# Altium PCB PCB1.PcbDoc
Units mil, origin at the board's own origin, x right, y up, seen from the top; angles counter-clockwise.
Board outline 1968.5 x 590.55 mil, 2 copper layers (Top Layer, Bottom Layer); 17 components, 14 nets, 53 pads, 9 vias.
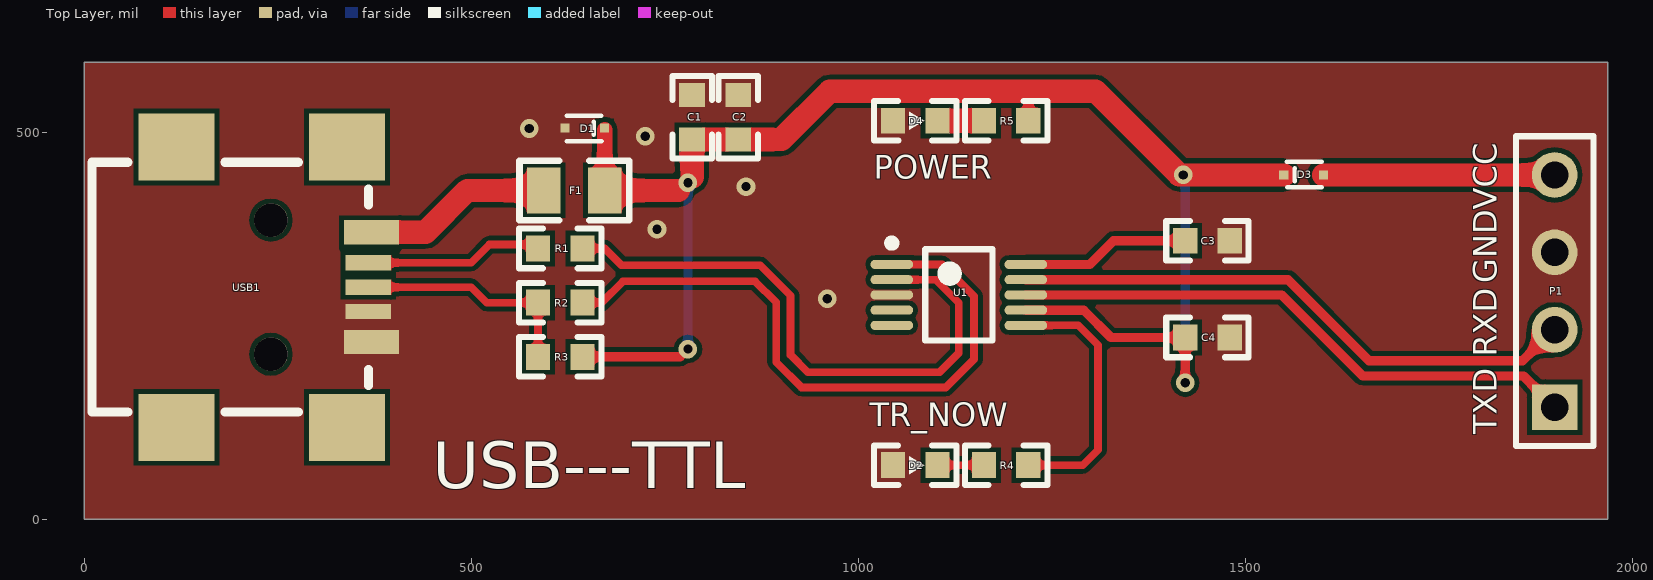
[diagram p0: Top Layer view]
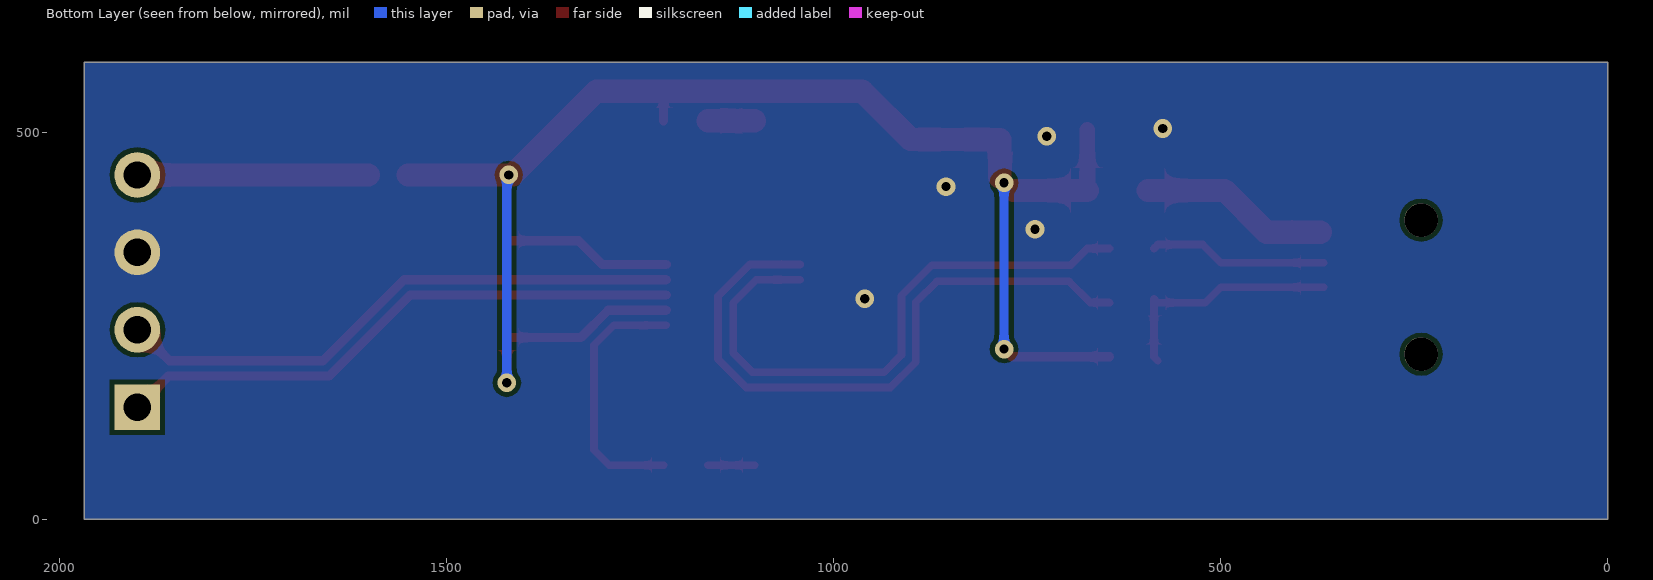
[diagram p1: Bottom Layer view, seen from below]
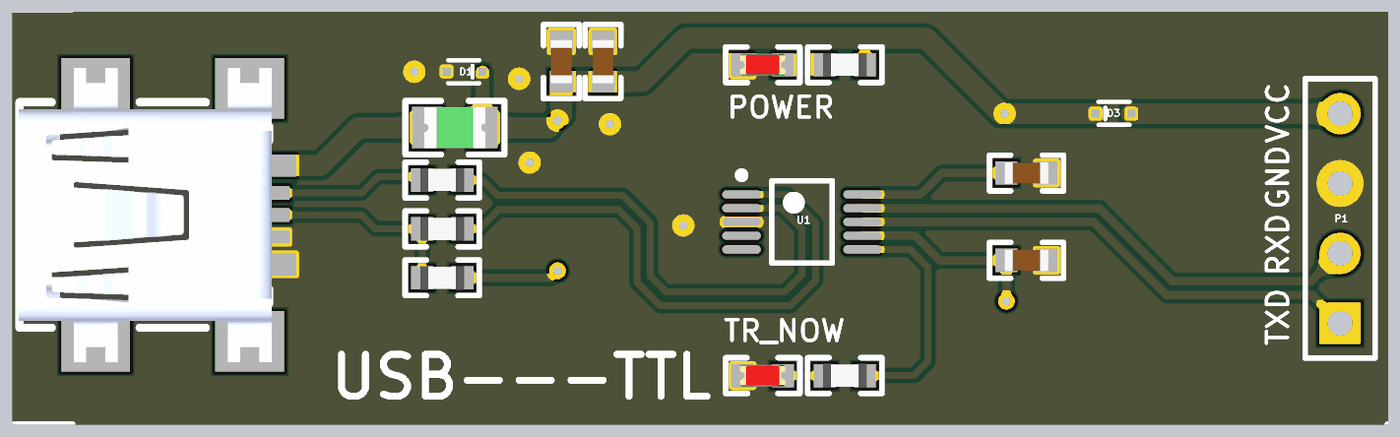
[diagram p2: 3D render of the assembled board from above, using the file's embedded part models]

## Layer stack, top to bottom
Top Solder: solder mask 0.4, Solder Resist, Dk 3.5
Top Layer: signal copper 1.4
Dielectric 1: dielectric 12.6, FR-4, Dk 4.8
Bottom Layer: signal copper 1.4
Bottom Solder: solder mask 0.4, Solder Resist, Dk 3.5

## Board outline
0,0 0,590.55 1968.5,590.55 1968.5,0

## Design rules (kind name [scope] priority, off if disabled: settings)
Clearance [All] p1: gap=6 ignorepadtopadclearanceinfootprint=TRUE
PlaneClearance [All] p1: clearance=8
PlaneConnect [All] p1: planeconnectstyle=Relief reliefexpansion=10 reliefentries=4 reliefconductorwidth=6 reliefairgap=8
PolygonConnect [All] p1: connectstyle=Direct reliefconductorwidth=10 reliefentries=4 polygonreliefangle="90 Angle" airgapwidth=10
RoutingVias [All] p1: holewidth=12 width=24 viastyle="Through Hole" minholewidth=12 minwidth=24 maxholewidth=12 maxwidth=24
SolderMaskExpansion [All] p1: expansion=4 istentingtop=FALSE
UnRoutedNet [All] p1: checkbadconnections=TRUE
Width [All] p1: maxlimit=30 minlimit=10 preferedwidth=10
27 further rules are at their usual default settings.

## Components (designator, comment, footprint, x,y, rotation, side; value= is the part's Value field where it differs from the comment)
C1 "106" C_SOP_0603 785.47,519.57 r270 top
C2 "104" C_SOP_0603 845,519.57 r270 top
C3 "104" C_SOP_0603 1451.26,360 r180 top
C4 "104" C_SOP_0603 1451.26,235 r0 top
D1 "DIODE" SOD-523 672.39,505.47 r180 top
D2 "LED" LED_0603_R 1073.74,70 r180 top
D3 "DIODE" SOD-523 1550,445 r0 top
D4 "LED" LED_0603_R 1073.74,515 r180 top
F1 "6V/0.5A" Fuse_0805 633.11,425 r0 top
P1 "Header 4" HDR1X4 1900,145 r90 top
R1 "33R" R_SMD_0603 615,350 r0 top
R2 "33R" R_SMD_0603 615,280 r0 top
R3 "NC" R_SMD_0603 615,210 r0 top
R4 "1K" R_SMD_0603 1191.26,70 r180 top
R5 "4.7K" R_SMD_0603 1191.26,515 r180 top
U1 "CH340E" MSOP_10 1130,290 r0 top
USB1 "USB_AB" USB_MINI_SMD 245,300 r180 top

## Footprints (in the part's own frame and the unit in brackets; to place one, negate y for a bottom-side part, rotate by r counter-clockwise, add the part's x,y. Pads: shape width x height; smd on the part's side, far side on the other; paste and mask are expansions set on the pad)
C_SOP_0603 [mm]
  rect 0.8x0.85 smd: 1(-0.73,0) 2(0.73,0)
  silkscreen extent -1.35,-0.65 1.35,0.65, body extent -0.8,-0.4 0.8,0.4, height 0.6
Fuse_0805 [mm]
  rect 1.1x1.5 smd: 1(-1,0) 2(1,0)
  silkscreen extent -1.8,-0.97 1.8,0.97, body extent -1.1,-0.75 1.1,0.75, height 1.24
HDR1X4 [mm] "Connector; Header; 4 Position"
  rect 1.5x1.5 hole 0.9: 1(0,0)
  round 1.5 hole 0.9: 2(2.54,0) 3(5.08,0) 4(7.62,0)
  silkscreen extent -1.27,-1.27 8.89,1.27
LED_0603_R [mm]
  rect 0.8x0.85 smd: 1(-0.73,0) 2(0.73,0)
  silkscreen extent -1.35,-0.65 1.35,0.65, body extent -0.81,-0.4 0.81,0.4, height 0.6
MSOP_10 [mm] "TSSOP, 10-Leads, Body 3.00x3.00mm, Pitch 0.50mm, IPC Medium Density"
  oval 1.4x0.3 smd: 1(-2.2,1) 2(-2.2,0.5) 3(-2.2,0) 4(-2.2,-0.5) 5(-2.2,-1) 6(2.2,-1) 7(2.2,-0.5) 8(2.2,0) 9(2.2,0.5) 10(2.2,1)
  silkscreen extent -2.32,-1.5 1.1,1.82, body extent -1.5,-1.5 1.5,1.5, height 0.8
R_SMD_0603 [mm]
  rect 0.8x0.85 smd: 1(-0.73,0) 2(0.73,0)
  silkscreen extent -1.35,-0.65 1.35,0.65, body extent -0.8,-0.43 0.8,0.43, height 0.48
SOD-523 [mm]
  rect 0.3x0.3 smd: 1(0,0) 2(1.3,0)
  silkscreen extent 0.1,-0.41 1.24,0.43
USB_MINI_SMD [mm]
  rect 1.8x0.8 smd: 1(-3.2,-1.8) 5(-3.2,1.8)
  rect 1.5x0.5 smd: 2(-3.1,-0.8) 3(-3.1,0) 4(-3.1,0.8)
  round 1.1 hole 1.1 unplated: H1(0.1,2.2) H2(0.1,-2.2)
  rect 2.5x2.2 smd: H3(-2.4,-4.6) H4(-2.4,4.6) H5(3.2,-4.6) H6(3.2,4.6)
  silkscreen extent -3.1,-4.1 5.97,4.1, body extent -3.2,-5.35 6,5.35, height 3.95

## Part data
C1 C2 C3 C4: library part C_SMD
F1: library part FUSE
P1: "Header, 4-Pin", LatestRevisionDate=17-Jul-2002, LatestRevisionNote="Re-released for DXP Platform.", Publisher="Altium Limited"
R1 R2 R3 R4 R5: library part R_SMD

## Via types
v1: diameter 24, hole 12, Top Layer to Bottom Layer, 9 vias

## Nets (pads, with @x,y where several pads share a name; then routed paths per layer and width w, separated by ;. In a path a pad name is that pad's centre, name@x,y a point inside that pad or via, vN(x,y) a via of type N, cw(c..) or ccw(c..) an arc to the next point about the centre after c; other vN are vias at no path point)
GND: C1.1 C2.1 C3.1 C4.2 D1.2 D2.2 D4.2 P1.3 U1.3 USB1.4 USB1.5
  other v1: 960,285 740,375 855,430 725,495 575,505
NetC3_2: C3.2 U1.10 | length 218.6
  Top Layer w12: U1.10 1299.37,329.37 1330,360 C3.2
NetD2_1: D2.1 R4.2 | length 60
  Top Layer w10: D2.1 R4.2
NetD3_2: D3.2 P1.4 | length 298.8
  Top Layer w30: D3.2 P1.4
NetD4_1: D4.1 R5.2 | length 60
  Top Layer w30: D4.1 R5.2
NetF1_1: F1.1 USB1.1 | length 245.2
  Top Layer w30: USB1.1 440.87,370.87 495,425 F1.1
NetR1_1: R1.1 USB1.2 | length 231
  Top Layer w10: USB1.2 499.87,331.5 523.38,355 581.26,355 R1.1
NetR2_1: R2.1 R3.1 USB1.3 | length 311.6
  Top Layer w10: USB1.3 500,300 520,280 581.26,280 586.26,285 R2.1 R3.1 R3.1@581.26,205
RXD: P1.2 U1.9 | length 743.3
  Top Layer w12: U1.9 1555.39,309.69 1660.08,205 1858.45,205 1898.45,245 P1.2
TNOW: R4.1 U1.6 | length 337.3
  Top Layer w10: U1.6 1284.37,250.63 1310,225 1310,90 1290,70 R4.1
TXD: P1.1 U1.8 | length 743.4
  Top Layer w12: U1.8 1547.24,290 1651.93,185.31 1859.69,185.31 P1.1
USB_5V: C1.2 C2.2 C4.1 D1.1 D3.1 F1.2 R3.2 R5.1 U1.7 | length 2003.8
  Top Layer w12: R3.2 770,210 v1(780,220) ; 1215,553.18 1220,548.18 R5.1 ; U1.7 1291.43,270.32 1326.75,235 C4.1@1421.26,235 ; v1@1420,175 1421.1,175 v1(1422.53,176.43) v1@1422.53,177.47 ; v1@1422.52,177.48 C4.1
  Top Layer w20: F1.2 D1.1@672.48,503.7
  Top Layer w30: F1.2 767.9,425 ; v1@785.47,442.57 C1.2 C2.2 900.83,490.83 963.18,553.18 1215,553.18 1306.82,553.18 1415,445 v1(1420,445) D3.1
  Bottom Layer w12: v1(780,220) v1(780,435) ; v1(1420,445) 1422.53,442.47 v1(1422.53,176.43)
USB_DN: R1.2 U1.2 | length 771.7
  Top Layer w10: R1.2 672.36,350 694.1,328.26 873.42,328.26 912.64,289.04 912.64,212.36 935,190 1105,190 1130,215 1130,280 1100.31,309.69 U1.2
USB_DP: R2.2 U1.1 | length 839.4
  Top Layer w10: R2.2 643.93,280.19 668.63,280.19 696.18,307.75 866.57,307.75 894,280.32 894,203.16 926.85,170.32 1113.15,170.32 1149.69,206.85 1149.69,288.15 1108.47,329.37 U1.1
pads on no net: U1.4 U1.5 USB1.H1 USB1.H2 USB1.H3 USB1.H4 USB1.H5 USB1.H6

## Polygon pours and split planes (outlines as drawn)
GND on Bottom Layer "Bottom Layer-GND" (solid, remove dead copper, pour order 2): 0,0 0,590.55 1968.5,590.55 1968.5,0
GND on Top Layer "Top Layer-GND" (solid, remove dead copper, pour order 1): 0,0 0,590.55 1968.5,590.55 1968.5,0

## Silkscreen, mask and mechanical layers (free items; w line width, h text height)
Top Overlay:
  text "POWER" at 1020,440 h30
  text "VCC" at 1825,400 h30 r90
  text "GND" at 1825,305 h30 r90
  text "RXD" at 1825,210 h30 r90
  text "TR_NOW" at 1015,120 h30
  text "TXD" at 1825,110 h30 r90
  text "USB---TTL" at 450,40 h60
Mechanical 1:
  the board outline again, w6

## Dimensions
85,595 to 0,0 on Top Overlay
0,0 to 1968.5,0 on Top Overlay